# Altium PCB LP_ECG-X01.PcbDoc (part 3 of 4)
Units mm, origin at the board's own origin, x right, y up, seen from the top; angles counter-clockwise.
Board outline 54.86 x 17.53 mm, 2 copper layers (Top Layer, Bottom Layer), stack 0.141 mm thick; 98 components, 68 nets, 322 pads, 93 vias.
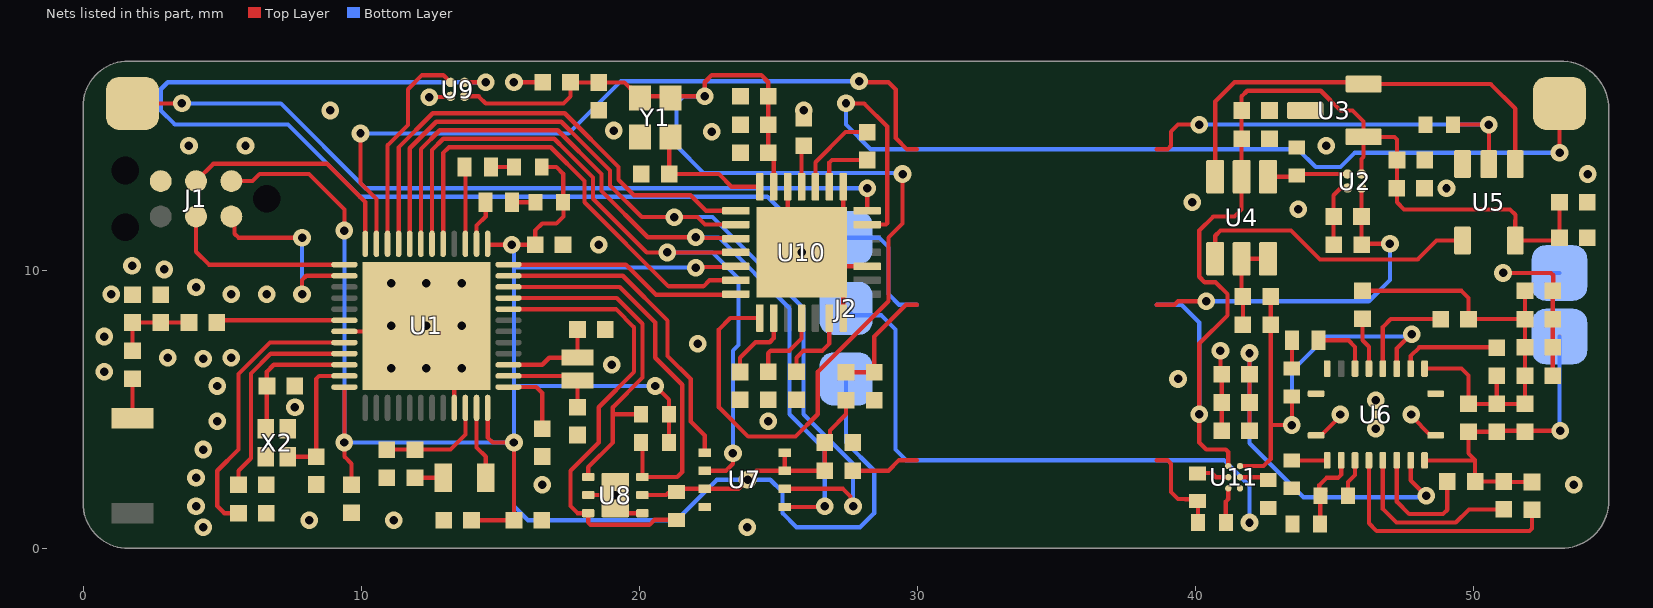
[diagram p2: the nets of this part, all layers, seen from the top]

## Part data (continued)
R10: library part R-0402(1005), "Fixed Resistor, Metal Glaze/thick Film, 0.0625W, 20000ohm, 50V, 1% +/-Tol, 100ppm/Cel, Surface Mount, 0402", Case Code (Imperial)=0402, Case Code (Metric)=1005, Manufacturer=Yageo, Manufacturer Part Number=AC0402FR-0720KL, Max Operating Temperature=155°C, Max Power Dissipation=63mW, Min Operating Temperature=-55°C, Power Rating=62.5mW, Supplier Part Number 1=YAG3454CT-ND, Temperature Coefficient=100ppm/°C, Tolerance=1%, Voltage Rating=50V, Case/Package=0402, Category="Chip SMD Resistors", ComponentLink1Description=https://datasheet.ciiva.com:443/pdfs/VipMasterIC/IC/YAGO/YAGO-S-A0003597364/YAGO-S-A0003597364-1.pdf?src-supplier=IHS+Markit, ComponentLink1URL=https://datasheet.ciiva.com:443/pdfs/VipMasterIC/IC/YAGO/YAGO-S-A0003597364/YAGO-S-A0003597364-1.pdf?src-supplier=IHS+Markit, ComponentLink2Description=http://www.mouser.com/ds/2/447/yageodocoutput-1111992.pdf?src-supplier=Mouser, ComponentLink2URL=http://www.mouser.com/ds/2/447/yageodocoutput-1111992.pdf?src-supplier=Mouser, ComponentLink3Description=http://www.yageo.com/NewPortal/yageodocoutput?fileName=/pdf/R-Chip/PYu-AC_51_RoHS_L_6.pdf&src-supplier=Digi-Key, ComponentLink3URL=http://www.yageo.com/NewPortal/yageodocoutput?fileName=/pdf/R-Chip/PYu-AC_51_RoHS_L_6.pdf&src-supplier=Digi-Key, Composition="Thick Film", Features="Moisture Resistant,Automotive AEC-Q200", Height=0.015inch, Length=0.039inch, Number of Terminations=2, Packaging="Tape and Reel", Pricing 1="1=0.10000, 10=0.02100, 100=0.00870, 1000=0.00390, 2500=0.00338, 5000=0.00279 (USD)", Resistance=20kR, RoHS=Yes, Supplier 1=Digi-Key, Termination=SMD/SMT, Width=0.02inch
R13: library part R-0402(1005), "Fixed Resistor, Metal Glaze/thick Film, 0.0625W, 464ohm, 50V, 1% +/-Tol, 100ppm/Cel, Surface Mount, 0402", Case Code (Imperial)=0402, Case Code (Metric)=1005, Manufacturer=Yageo, Manufacturer Part Number=RC0402FR-07464RL, Max Operating Temperature=155°C, Max Power Dissipation=63mW, Min Operating Temperature=-55°C, Package Quantity=1, Power Rating=62.5mW, Supplier Part Number 1=311-464LRCT-ND, Temperature Coefficient=100ppm/°C, Tolerance=1%, Voltage Rating=50V, Case/Package=0402, Category="Chip SMD Resistors", ComponentLink1Description=https://datasheet.ciiva.com:443/pdfs/VipMasterIC/IC/YAGO/YAGO-S-A0008145938/YAGO-S-A0008145938-1.pdf?src-supplier=IHS+Markit, ComponentLink1URL=https://datasheet.ciiva.com:443/pdfs/VipMasterIC/IC/YAGO/YAGO-S-A0008145938/YAGO-S-A0008145938-1.pdf?src-supplier=IHS+Markit, ComponentLink2Description=https://datasheet.ciiva.com/2519/pyu-r-int-thick-7-2519093.pdf?src-supplier=Digi-Key, ComponentLink2URL=https://datasheet.ciiva.com/2519/pyu-r-int-thick-7-2519093.pdf?src-supplier=Digi-Key, ComponentLink3Description=https://datasheet.ciiva.com/2519/pyu-r-int-thick-7-2519094.pdf?src-supplier=Digi-Key, ComponentLink3URL=https://datasheet.ciiva.com/2519/pyu-r-int-thick-7-2519094.pdf?src-supplier=Digi-Key, ComponentLink4Description=https://datasheet.ciiva.com/2519/pyu-r-int-thick-7-2519095.pdf?src-supplier=Digi-Key, ComponentLink4URL=https://datasheet.ciiva.com/2519/pyu-r-int-thick-7-2519095.pdf?src-supplier=Digi-Key, ComponentLink5Description=https://datasheet.ciiva.com/17052/pyu-rc0402-51-rohs-l-6-r-17052231.pdf?src-supplier=Future+Electronics, ComponentLink5URL=https://datasheet.ciiva.com/17052/pyu-rc0402-51-rohs-l-6-r-17052231.pdf?src-supplier=Future+Electronics, ComponentLink6Description=https://datasheet.ciiva.com/8885/pyu-rc0402-51-rohs-l-6-8885608.pdf?src-supplier=Avnet, ComponentLink6URL=https://datasheet.ciiva.com/8885/pyu-rc0402-51-rohs-l-6-8885608.pdf?src-supplier=Avnet, ComponentLink7Description=https://datasheet.ciiva.com/12577/pyu-rc0402-51-rohs-l-6-r-12577387.pdf?src-supplier=Mouser, ComponentLink7URL=https://datasheet.ciiva.com/12577/pyu-rc0402-51-rohs-l-6-r-12577387.pdf?src-supplier=Mouser, Composition="Thick Film", Contact Plating=Tin,Matte, Depth=0.5mm, Features="Moisture Resistant", Height=0.016inch, Lead Free="Lead Free", Length=1mm, Military Standard=Not, Number of Terminations=2, Packaging="Tape and Reel", Pricing 1="1=0.10000, 10=0.01600, 100=0.00640, 1000=0.00289, 2500=0.00251, 5000=0.00207 (USD)", Resistance=464R, RoHS=Yes, Stock 1=10914, Supplier 1=Digi-Key, Termination=SMD/SMT, Voltage Rating (DC)=50V, Weight=2.3E-05oz, Width=0.02inch
R16: library part R-0402(1005), "Fixed Resistor, Metal Glaze/thick Film, 0.0625W, 3300ohm, 50V, 1% +/-Tol, 100ppm/Cel, Surface Mount, 0402", Case Code (Imperial)=0402, Case Code (Metric)=1005, Manufacturer=Yageo, Manufacturer Part Number=AC0402FR-073K3L, Max Operating Temperature=155°C, Max Power Dissipation=63mW, Min Operating Temperature=-55°C, Power Rating=62.5mW, Supplier Part Number 1=YAG3483CT-ND, Temperature Coefficient=100ppm/°C, Tolerance=1%, Voltage Rating=50V, Case/Package=0402, Category="Chip SMD Resistors", ComponentLink1Description=https://datasheet.ciiva.com:443/pdfs/VipMasterIC/IC/YAGO/YAGO-S-A0003597364/YAGO-S-A0003597364-1.pdf?src-supplier=IHS+Markit, ComponentLink1URL=https://datasheet.ciiva.com:443/pdfs/VipMasterIC/IC/YAGO/YAGO-S-A0003597364/YAGO-S-A0003597364-1.pdf?src-supplier=IHS+Markit, ComponentLink2Description=http://www.mouser.com/ds/2/447/yageodocoutput-1111992.pdf?src-supplier=Mouser, ComponentLink2URL=http://www.mouser.com/ds/2/447/yageodocoutput-1111992.pdf?src-supplier=Mouser, ComponentLink3Description=http://www.yageo.com/NewPortal/yageodocoutput?fileName=/pdf/R-Chip/PYu-AC_51_RoHS_L_6.pdf&src-supplier=Digi-Key, ComponentLink3URL=http://www.yageo.com/NewPortal/yageodocoutput?fileName=/pdf/R-Chip/PYu-AC_51_RoHS_L_6.pdf&src-supplier=Digi-Key, ComponentLink4Description=http://www.yageo.com/documents/recent/PYu-AC_51_RoHS_L_2_revised.pdf?src-supplier=Future+Electronics, ComponentLink4URL=http://www.yageo.com/documents/recent/PYu-AC_51_RoHS_L_2_revised.pdf?src-supplier=Future+Electronics, Composition="Thick Film", Features="Moisture Resistant,Automotive AEC-Q200", Height=0.015inch, Lead Free="Lead Free", Length=0.039inch, Number of Terminations=2, Packaging="Tape and Reel", Pricing 1="1=0.10000, 10=0.02100, 100=0.00870, 1000=0.00390, 2500=0.00338, 5000=0.00279 (USD)", Resistance=3.3kR, RoHS=Yes, Supplier 1=Digi-Key, Termination=SMD/SMT, Width=0.02inch
U1: library part NRSC-NRF52832-QF-48, "Multiprotocol Bluetooth Smart, ANT/ANT+ and Proprietary System-on-Chip, 2.4 GHz, 256 KB FLASH, 1.7 to 3.6 V, -40 to 85 degC, 48-Pin QFN, RoHS, Tape and Reel", Current - Receiving=5.4mA, Current - Transmitting=7.5mA, Frequency=2.4GHz, Manufacturer="Nordic Semiconductor", Supplier Part Number 1=1490-1067-1-ND, Category="RF Receivers, Transceivers", ComponentLink1Description=https://datasheet.ciiva.com:443/pdfs/VipMasterIC/IC/NRSA/NRSA-S-A0002414264/NRSA-S-A0002414264-1.pdf?src-supplier=IHS+Markit, ComponentLink1URL=https://datasheet.ciiva.com:443/pdfs/VipMasterIC/IC/NRSA/NRSA-S-A0002414264/NRSA-S-A0002414264-1.pdf?src-supplier=IHS+Markit, ComponentLink5Description=http://infocenter.nordicsemi.com/pdf/nRF52832_PB_v1.7.pdf?src-supplier=Digi-Key, ComponentLink5URL=http://infocenter.nordicsemi.com/pdf/nRF52832_PB_v1.7.pdf?src-supplier=Digi-Key, ComponentLink6Description=http://infocenter.nordicsemi.com/pdf/nRF52832_PS_v1.4.pdf?src-supplier=Digi-Key, ComponentLink6URL=http://infocenter.nordicsemi.com/pdf/nRF52832_PS_v1.4.pdf?src-supplier=Digi-Key, Data Rate=2Mbps, Interface=SPI,UART, Manufacturer Part Number=NRF52832-QFAA-R7, Memory Size=64KB, Number of GPIO=32, Packaging="Tape and Reel", Pricing 1="1=5.46000, 10=4.87500, 25=4.38760, 100=3.99750, 250=3.60752, 500=3.23700 (USD)", RoHS=No, Sensitivity=-96dBm, Stock 1=7487, Supplier 1=Digi-Key
U2: library part ADP160-3_3V, "Fixed Positive LDO Regulator, 3.3V, 0.195V Dropout, CMOS, PBGA4", Dropout Voltage=105mV, Manufacturer="Analog Devices", Manufacturer Part Number=ADP160ACBZ-3.3-R7, Max Input Voltage=5.5V, Max Operating Temperature=125°C, Max Output Current=150mA, Max Output Voltage=4.2V, Max Supply Current=42uA, Min Current Limit=220mA, Min Input Voltage=2.2V, Min Operating Temperature=-40°C, Min Output Voltage=1.2V, Nominal Output Voltage=3.3V, Output Voltage Accuracy=2%, Package Quantity=3000, Power Supply Rejection Ratio (PSRR)=60dB, Supplier Part Number 1=ADP160ACBZ-3.3-R7CT-ND, Accuracy=2%, Category="Voltage Regulators - Linear", ComponentLink1Description=https://datasheet.ciiva.com:443/pdfs/VipMasterIC/IC/ANDI/ANDI-S-A0005865400/ANDI-S-A0005865400-1.pdf?src-supplier=IHS+Markit, ComponentLink1URL=https://datasheet.ciiva.com:443/pdfs/VipMasterIC/IC/ANDI/ANDI-S-A0005865400/ANDI-S-A0005865400-1.pdf?src-supplier=IHS+Markit, ComponentLink2Description=https://datasheet.ciiva.com/15271/adp160-161-162-163-15271721.pdf?src-supplier=Arrow+Europe, ComponentLink2URL=https://datasheet.ciiva.com/15271/adp160-161-162-163-15271721.pdf?src-supplier=Arrow+Europe, ComponentLink3Description=https://datasheet.ciiva.com/8242/adp160-161-162-163-8242024.pdf?src-supplier=Avnet, ComponentLink3URL=https://datasheet.ciiva.com/8242/adp160-161-162-163-8242024.pdf?src-supplier=Avnet, ComponentLink4Description=https://datasheet.ciiva.com/18552/adp160-161-162-163-18552347.pdf?src-supplier=Digi-Key, ComponentLink4URL=https://datasheet.ciiva.com/18552/adp160-161-162-163-18552347.pdf?src-supplier=Digi-Key, ComponentLink5Description=https://datasheet.ciiva.com/18552/adp160-161-162-163-18552348.pdf?src-supplier=Digi-Key, ComponentLink5URL=https://datasheet.ciiva.com/18552/adp160-161-162-163-18552348.pdf?src-supplier=Digi-Key, ComponentLink6Description=https://datasheet.ciiva.com/18552/adp160-161-162-163-18552349.pdf?src-supplier=Digi-Key, ComponentLink6URL=https://datasheet.ciiva.com/18552/adp160-161-162-163-18552349.pdf?src-supplier=Digi-Key, Lead Free="Contains Lead", Mount="Surface Mount", Nominal Supply Current=42uA, Number of Outputs=1, Number of Pins=4, Number of Regulators=1, Operating Supply Current=42uA, Output Current=150mA, Output Type=Fixed, Output Voltage=3.3V, Packaging="Tape and Reel", Polarity=Positive, Pricing 1="1=1.12000, 10=1.00300, 25=0.95200, 100=0.73100, 250=0.64600, 500=0.61200, 1000=0.49300 (USD)", Radiation Hardening=No, REACH SVHC="No SVHC", RoHS=Yes, Supplier 1=Digi-Key
U3: library part CMP-04937-000003-1, "LP HALL 32FBDBZR", Case/Package=TO-236-3, Manufacturer="Texas Instruments", Max Operating Temperature=85°C, Max Output Current=5mA, Max Supply Current=2.6mA, Min Operating Temperature=-40°C, Supplier Part Number 1=296-47323-1-ND, Category="Integrated Circuits (ICs)", ComponentLink1Description=https://www.ti.com:443/lit/ds/symlink/drv5032.pdf?src-supplier=IHS+Markit, ComponentLink1URL=https://www.ti.com:443/lit/ds/symlink/drv5032.pdf?src-supplier=IHS+Markit, ComponentLink2Description=Datasheet, ComponentLink2URL=http://www.ti.com/lit/ds/symlink/drv5032.pdf, ComponentLink3Description=http://www.ti.com/lit/ds/symlink/drv5032.pdf?src-supplier=Digi-Key, ComponentLink3URL=http://www.ti.com/lit/ds/symlink/drv5032.pdf?src-supplier=Digi-Key, ComponentLink4Description=http://www.ti.com/general/docs/suppproductinfo.tsp?distId=10&amp;gotoUrl=http%3A%2F%2Fwww.ti.com%2Flit%2Fgpn%2Fdrv5032&src-supplier=Digi-Key, ComponentLink4URL=http://www.ti.com/general/docs/suppproductinfo.tsp?distId=10&amp;gotoUrl=http%3A%2F%2Fwww.ti.com%2Flit%2Fgpn%2Fdrv5032&src-supplier=Digi-Key, Manufacturer Part Number=DRV5032FBDBZR, Packaging="Cut Tape", Pricing 1="1=0.80000, 5=0.76600, 10=0.66600, 25=0.58520, 50=0.48600, 100=0.41400, 500=0.36000, 1000=0.31500 (USD)", RoHS=No, Sensing Method="Hall Effect", Stock 1=6326, Supplier 1=Digi-Key
U4: library part CMP-0859-00228-3, "CONFIGURABLE MULTIPLE-FUNCTION GATE, DBV0006A, LARGE T&R", Case/Package=SOT-23, High Level Output Current=-32mA, Low Level Output Current=32mA, Manufacturer="Texas Instruments", Max Operating Temperature=125°C, Max Supply Voltage=5.5V, Min Operating Temperature=-40°C, Min Supply Voltage=1.65V, Package Quantity=3000, Quiescent Current=10uA, Supplier Part Number 1=296-15574-1-ND, Category="Logic Gates", ComponentLink1Description=https://www.ti.com:443/lit/ds/symlink/sn74lvc1g57.pdf?src-supplier=IHS+Markit, ComponentLink1URL=https://www.ti.com:443/lit/ds/symlink/sn74lvc1g57.pdf?src-supplier=IHS+Markit, ComponentLink2Description=https://datasheet.ciiva.com/15090/getdatasheetpartid-173082-15090973.pdf?src-supplier=Verical, ComponentLink2URL=https://datasheet.ciiva.com/15090/getdatasheetpartid-173082-15090973.pdf?src-supplier=Verical, ComponentLink3Description=https://datasheet.ciiva.com/1880/sn74lvc1g57-1880083.pdf?src-supplier=Digi-Key, ComponentLink3URL=https://datasheet.ciiva.com/1880/sn74lvc1g57-1880083.pdf?src-supplier=Digi-Key, ComponentLink4Description=https://datasheet.ciiva.com/1880/sn74lvc1g57-1880084.pdf?src-supplier=Digi-Key, ComponentLink4URL=https://datasheet.ciiva.com/1880/sn74lvc1g57-1880084.pdf?src-supplier=Digi-Key, ComponentLink5Description=https://datasheet.ciiva.com/46395/1882763-46395382.pdf?src-supplier=Element14, ComponentLink5URL=https://datasheet.ciiva.com/46395/1882763-46395382.pdf?src-supplier=Element14, ComponentLink6Description=https://datasheet.ciiva.com/46439/1834192-46439175.pdf?src-supplier=Element14, ComponentLink6URL=https://datasheet.ciiva.com/46439/1834192-46439175.pdf?src-supplier=Element14, ComponentLink7Description=https://datasheet.ciiva.com/7783/1771418-7783483.pdf?src-supplier=Element14, ComponentLink7URL=https://datasheet.ciiva.com/7783/1771418-7783483.pdf?src-supplier=Element14, ComponentLink8Description=https://datasheet.ciiva.com/7783/1771418-7783484.pdf?src-supplier=Element14, ComponentLink8URL=https://datasheet.ciiva.com/7783/1771418-7783484.pdf?src-supplier=Element14, ComponentLink9Description=https://datasheet.ciiva.com/1880/sn74lvc1g57-1880082.pdf?src-supplier=Digi-Key, ComponentLink9URL=https://datasheet.ciiva.com/1880/sn74lvc1g57-1880082.pdf?src-supplier=Digi-Key, ComponentLink10Description=https://datasheet.ciiva.com/48702/001075107-da-01-en-ic-mult-fun-sn74lvc1g57dbvr-sot-23-6-tid-48702374.pdf?src-supplier=Conrad, ComponentLink10URL=https://datasheet.ciiva.com/48702/001075107-da-01-en-ic-mult-fun-sn74lvc1g57dbvr-sot-23-6-tid-48702374.pdf?src-supplier=Conrad, Contact Plating=Gold, Height=1.3mm, Lead Free="Lead Free", Length=3.05mm, Logic Function="NAND GATE,AND GATE,NOR GATE,OR GATE,Inverter,Multi Function", Manufacturer Part Number=SN74LVC1G57DBVR, Max Output Current=32mA, Mount="Surface Mount", Number of Bits=1, Number of Circuits=1, Number of Elements=1, Number of Gates=1, Number of Input Lines=2, Number of Inputs=3, Number of Output Lines=1, Number of Outputs=1, Number of Pins=6, Output Current=32mA, Packaging="Tape and Reel", Pricing 1="1=0.37000, 10=0.28100, 25=0.25320, 100=0.17480, 250=0.14720, 500=0.11960, 1000=0.09200 (USD)", Propagation Delay=6.3ns, Radiation Hardening=No, REACH SVHC="No SVHC", RoHS=Yes, Schmitt Trigger Input=Yes, Stock 1=11185, Supplier 1=Digi-Key, Termination=SMD/SMT, Turn-On Delay Time=6.1ns, Weight=0.000229oz, Width=1.75mm
U5: library part CMP-0859-00176-3, "Single Positive-Edge-Triggered D-Type Flip-Flop, DBV0005A, LARGE T&R", Case/Package=SOT-23, Frequency=160MHz, High Level Output Current=-32mA, Low Level Output Current=32mA, Manufacturer="Texas Instruments", Max Operating Temperature=125°C, Max Supply Voltage=5.5V, Min Operating Temperature=-40°C, Min Supply Voltage=1.65V, Package Quantity=3000, Supplier Part Number 1=296-9851-1-ND, Category="Latches and Flip Flops", Clock Edge Trigger Type="Positive Edge", ComponentLink1Description=https://www.ti.com:443/lit/ds/symlink/sn74lvc1g80.pdf?src-supplier=IHS+Markit, ComponentLink1URL=https://www.ti.com:443/lit/ds/symlink/sn74lvc1g80.pdf?src-supplier=IHS+Markit, ComponentLink2Description=https://datasheet.ciiva.com/15091/getdatasheetpartid-71921-15091286.pdf?src-supplier=Verical, ComponentLink2URL=https://datasheet.ciiva.com/15091/getdatasheetpartid-71921-15091286.pdf?src-supplier=Verical, ComponentLink3Description=https://datasheet.ciiva.com/1854/sn74lvc1g80-1854761.pdf?src-supplier=Digi-Key, ComponentLink3URL=https://datasheet.ciiva.com/1854/sn74lvc1g80-1854761.pdf?src-supplier=Digi-Key, ComponentLink4Description=https://datasheet.ciiva.com/46395/1882705-46395835.pdf?src-supplier=Element14, ComponentLink4URL=https://datasheet.ciiva.com/46395/1882705-46395835.pdf?src-supplier=Element14, ComponentLink5Description=https://datasheet.ciiva.com/1854/sn74lvc1g80-1854762.pdf?src-supplier=Digi-Key, ComponentLink5URL=https://datasheet.ciiva.com/1854/sn74lvc1g80-1854762.pdf?src-supplier=Digi-Key, ComponentLink6Description=https://datasheet.ciiva.com/8055/1831218-8055610.pdf?src-supplier=Element14, ComponentLink6URL=https://datasheet.ciiva.com/8055/1831218-8055610.pdf?src-supplier=Element14, ComponentLink7Description=https://datasheet.ciiva.com/1854/sn74lvc1g80-1854763.pdf?src-supplier=Digi-Key, ComponentLink7URL=https://datasheet.ciiva.com/1854/sn74lvc1g80-1854763.pdf?src-supplier=Digi-Key, Lead Free="Lead Free", Logic Function=D-Type,Flip-Flop, Manufacturer Part Number=SN74LVC1G80DBVR, Max Frequency=160MHz, Mount="Surface Mount", Number of Bits=1, Number of Bits per Element=1, Number of Circuits=1, Number of Elements=1, Number of Gates=1, Number of Input Lines=1, Number of Output Lines=1, Number of Pins=5, Output Current=32mA, Packaging="Tape and Reel", Polarity=Inverting, Pricing 1="1=0.32000, 10=0.24000, 25=0.21000, 100=0.13590, 250=0.11252, 500=0.09000, 1000=0.06900 (USD)", Propagation Delay=9.9ns, Radiation Hardening=No, REACH SVHC="No SVHC", RoHS=Yes, Stock 1=12348, Supplier 1=Digi-Key, Turn-On Delay Time=1.1ns, Weight=0.000557oz
U6: library part TI-BQ51013B-RHL20, "WPC 1.1 Compatible Fully Integrated Wireless Power Receiver IC, 4 V Min Input, 20-pin VQFN (RHL), Green (RoHS & no Sb/Br)", Case/Package=VQFN, Manufacturer="Texas Instruments", Max Operating Temperature=125°C, Min Operating Temperature=0°C, Operating Supply Current=8mA, Output Current=1.5A, Output Voltage=5V, Package Quantity=3000, Supplier Part Number 1=296-38885-1-ND, Category="Power Management ICs", ComponentLink1Description=https://www.ti.com:443/lit/ds/symlink/bq51013b.pdf?src-supplier=IHS+Markit, ComponentLink1URL=https://www.ti.com:443/lit/ds/symlink/bq51013b.pdf?src-supplier=IHS+Markit, ComponentLink2Description=https://datasheet.ciiva.com/6601/bq51013b-6601292.pdf?src-supplier=Digi-Key, ComponentLink2URL=https://datasheet.ciiva.com/6601/bq51013b-6601292.pdf?src-supplier=Digi-Key, Contact Plating=Gold, Lead Free="Lead Free", Logic Function=Receiver, Manufacturer Part Number=BQ51013BRHLR, Mount="Surface Mount", Number of Pins=20, Packaging="Tape and Reel", Pricing 1="1=3.33000, 10=2.97000, 25=2.67320, 100=2.43540, 250=2.19780, 500=1.97208, 1000=1.66320 (USD)", RoHS=Yes, Stock 1=8882, Supplier 1=Digi-Key
U7: library part CY15B108QI, "Memory Circuit, 8 MB FRAM", Manufacturer=Cypress, Manufacturer Part Number=CY15B108QI-20LPXI, Supplier Part Number 1=428-4721-ND, Category=Memory, ComponentLink1Description=https://datasheet.ciiva.com:443/pdfs/VipMasterIC/IC/CYPR/CYPR-S-A0008987076/CYPR-S-A0008987076-1.pdf?src-supplier=IHS+Markit, ComponentLink1URL=https://datasheet.ciiva.com:443/pdfs/VipMasterIC/IC/CYPR/CYPR-S-A0008987076/CYPR-S-A0008987076-1.pdf?src-supplier=IHS+Markit, Pricing 1="1=32.50000, 10=30.55500, 25=29.50560, 50=28.56820, 100=25.13780, 250=24.46300, 500=23.71318, 1000=23.43200 (USD)", RoHS=No, Stock 1=1421, Supplier 1=Digi-Key
U8: library part bceab6869a9cb85cf5675529ee35ce4, "TEMPERATURE SENSOR", Ambient Temperature Range High=+150°C, Ambient Temperature Range Low=-55°C, Manufacturer="Texas Instruments", Max Operating Temperature=150°C, Max Supply Voltage=5.5V, Min Supply Voltage=1.8V, Operating Supply Current=3.5-16uA, Package=DRV0006A, Supplier Part Number 1=296-51834-1-ND, Temperature="-55°C to +150°C", Automotive=No, Category=IC, ComponentLink1Description=https://www.ti.com:443/lit/ds/symlink/tmp117.pdf?src-supplier=IHS+Markit, ComponentLink1URL=https://www.ti.com:443/lit/ds/symlink/tmp117.pdf?src-supplier=IHS+Markit, ComponentLink2Description=Datasheet, ComponentLink2URL=http://www.ti.com/lit/ds/symlink/tmp117.pdf, ComponentLink3Description=http://www.ti.com/lit/gpn/tmp117?src-supplier=Digi-Key, ComponentLink3URL=http://www.ti.com/lit/gpn/tmp117?src-supplier=Digi-Key, Device Class L1=Sensors, Device Class L2="Temperature and Humidity Sensors", Device Class L3=unset, Digikey Description="TEMPERATURE SENSOR", Height=0.8mm, Interface=I2C,2-Wire,SMBus, Ipc Land Pattern Name=DFN200X200X80-6, Lead Free=Yes, Manufacturer Part Number=TMP117AIDRVR, Max Junction Temp=+150°C, Min Operating Temperature=-55°C, Mount="Surface Mount", Octopart=https://octopart.com/tmp117aidrvr-texas+instruments-95511044, Output Type=I2C, Packaging="Cut Tape", Pricing 1="1=8.02000, 5=7.07600, 10=6.25000, 25=5.07040, 50=4.48100, 100=4.36300, 500=3.65552, 1000=3.41968 (USD)", Resolution=16bits, RoHS=TRUE, Standoff Height=0mm, Stock 1=3558, Supplier 1=Digi-Key, Temperature Range High=+150°C, Temperature Range Low=-55°C
U9: library part ADP160-1_8V, "Fixed Positive LDO Regulator, 1.8V, 0.195V Dropout, CMOS, PBGA4", Manufacturer="Analog Devices", Manufacturer Part Number=ADP160ACBZ-1.8-R7, Max Input Voltage=5.5V, Max Operating Temperature=125°C, Max Output Current=150mA, Max Output Voltage=4.2V, Max Supply Current=42uA, Min Current Limit=220mA, Min Input Voltage=2.2V, Min Operating Temperature=-40°C, Min Output Voltage=1.2V, Output Voltage=1.8V, Output Voltage Accuracy=2%, Package Quantity=1, Power Supply Rejection Ratio (PSRR)=60dB, Quiescent Current=0pA, Supplier Part Number 1=ADP160ACBZ-1.8-R7CT-ND, Accuracy=2%, Category="Voltage Regulators - Linear", ComponentLink1Description=https://datasheet.ciiva.com:443/pdfs/VipMasterIC/IC/ANDI/ANDI-S-A0005865400/ANDI-S-A0005865400-1.pdf?src-supplier=IHS+Markit, ComponentLink1URL=https://datasheet.ciiva.com:443/pdfs/VipMasterIC/IC/ANDI/ANDI-S-A0005865400/ANDI-S-A0005865400-1.pdf?src-supplier=IHS+Markit, ComponentLink2Description=https://datasheet.ciiva.com/15270/adp160-161-162-163-15270706.pdf?src-supplier=Arrow+Europe, ComponentLink2URL=https://datasheet.ciiva.com/15270/adp160-161-162-163-15270706.pdf?src-supplier=Arrow+Europe, ComponentLink3Description=https://datasheet.ciiva.com/18552/adp160-161-162-163-18552055.pdf?src-supplier=Digi-Key, ComponentLink3URL=https://datasheet.ciiva.com/18552/adp160-161-162-163-18552055.pdf?src-supplier=Digi-Key, ComponentLink4Description=https://datasheet.ciiva.com/18552/adp160-161-162-163-18552056.pdf?src-supplier=Digi-Key, ComponentLink4URL=https://datasheet.ciiva.com/18552/adp160-161-162-163-18552056.pdf?src-supplier=Digi-Key, ComponentLink5Description=https://datasheet.ciiva.com/18552/adp160-161-162-163-18552054.pdf?src-supplier=Digi-Key, ComponentLink5URL=https://datasheet.ciiva.com/18552/adp160-161-162-163-18552054.pdf?src-supplier=Digi-Key, ComponentLink6Description=https://datasheet.ciiva.com/3224/adp160-161-162-163-3224663.pdf?src-supplier=Avnet, ComponentLink6URL=https://datasheet.ciiva.com/3224/adp160-161-162-163-3224663.pdf?src-supplier=Avnet, Contact Plating=Copper,Tin,Silver, Height=0.37mm, Lead Free="Contains Lead", Length=1mm, Mount="Surface Mount", Nominal Supply Current=42uA, Number of Outputs=1, Number of Pins=4, Number of Regulators=1, Operating Supply Current=42uA, Output Current=150mA, Output Type=Fixed, Packaging="Tape and Reel", Polarity=Positive, Pricing 1="1=1.12000, 10=1.00300, 25=0.95200, 100=0.73100, 250=0.64600, 500=0.61200, 1000=0.49300 (USD)", Radiation Hardening=No, RoHS=Yes, Stock 1=5770, Supplier 1=Digi-Key, Width=1mm
U10: "Analog Circuit, 1 Func, CMOS", Manufacturer=Maxim, Max Operating Temperature=70°C, Max Supply Voltage=2V, Min Operating Temperature=0°C, Min Supply Voltage=1.2V, Supplier Part Number 1=MAX30003CTI+-ND, Category="RF Semiconductors and Devices", ComponentLink1Description=https://datasheet.ciiva.com:443/pdfs/VipMasterIC/IC/MAXM/MAXM-S-A0009086108/MAXM-S-A0009086108-1.pdf?src-supplier=IHS+Markit, ComponentLink1URL=https://datasheet.ciiva.com:443/pdfs/VipMasterIC/IC/MAXM/MAXM-S-A0009086108/MAXM-S-A0009086108-1.pdf?src-supplier=IHS+Markit, ComponentLink2Description=http://www.farnell.com/datasheets/2159846.pdf?src-supplier=Farnell, ComponentLink2URL=http://www.farnell.com/datasheets/2159846.pdf?src-supplier=Farnell, ComponentLink3Description=https://pdfserv.maximintegrated.com/en/an/MAX-ECG-MONITOR-User-Guide.pdf?src-supplier=Digi-Key, ComponentLink3URL=https://pdfserv.maximintegrated.com/en/an/MAX-ECG-MONITOR-User-Guide.pdf?src-supplier=Digi-Key, ComponentLink4Description=http://www.farnell.com/datasheets/2159846.pdf?src-supplier=Element14, ComponentLink4URL=http://www.farnell.com/datasheets/2159846.pdf?src-supplier=Element14, Manufacturer Part Number=MAX30003CTI+, Number of Pins=28, Pricing 1="1=8.21000, 10=7.41200, 25=7.06760, 100=5.86090, 250=5.34380, 500=4.99902, 1000=4.98888 (USD)", REACH SVHC="No SVHC", RoHS=No, Stock 1=286, Supplier 1=Digi-Key
U11: "Power Supply Support Circuit", Battery Pack Voltage=4.2V, Manufacturer="Texas Instruments", Max Charge Current=250mA, Max Operating Temperature=85°C, Max Supply Voltage=6.45V, Min Operating Temperature=-40°C, Min Supply Voltage=3.5V, Operating Supply Current=75nA, Output Voltage=4.35V, Package Quantity=250, Supplier Part Number 1=296-38373-1-ND, Category="Batteries and Accessories", ComponentLink1Description=https://www.ti.com:443/lit/ds/symlink/bq25100.pdf?src-supplier=IHS+Markit, ComponentLink1URL=https://www.ti.com:443/lit/ds/symlink/bq25100.pdf?src-supplier=IHS+Markit, ComponentLink2Description=https://datasheet.ciiva.com/46404/1854517-46404758.pdf?src-supplier=Element14, ComponentLink2URL=https://datasheet.ciiva.com/46404/1854517-46404758.pdf?src-supplier=Element14, Contact Plating=Copper,Tin,Silver, Fault Protection="Over Voltage,Over Temperature,Short Circuit", Lead Free="Lead Free", Manufacturer Part Number=BQ25100YFPT, Mount="Surface Mount", Number of Cells=1, Number of Pins=6, Output Current=250mA, Packaging="Tape and Reel", Pricing 1="1=2.24000, 10=2.01100, 25=1.89760, 100=1.51800 (USD)", REACH SVHC="No SVHC", RoHS=Yes, Stock 1=3049, Supplier 1=Digi-Key, Weight=6E-05oz
X1: library part CRYSTAL_32K768, "Parallel - Fundamental Quartz Crystal, 0.032768MHz Nom", Case/Package=SMD/SMT, ESR (Equivalent Series Resistance)=90kR, Frequency=32.768kHz, Frequency Tolerance=20ppm, Load Capacitance=9pF, Manufacturer="ECS International", Manufacturer Part Number=ECS-.327-9-1210-TR, Max Operating Temperature=85°C, Min Operating Temperature=-40°C, Supplier Part Number 1=XC2283CT-ND, Category="Crystals and Oscillators", ComponentLink1Description=https://datasheet.ciiva.com:443/pdfs/VipMasterIC/IC/ECSI/ECSI-S-A0009254912/ECSI-S-A0009254912-1.pdf?src-supplier=IHS+Markit, ComponentLink1URL=https://datasheet.ciiva.com:443/pdfs/VipMasterIC/IC/ECSI/ECSI-S-A0009254912/ECSI-S-A0009254912-1.pdf?src-supplier=IHS+Markit, ComponentLink2Description=https://www.ecsxtal.com/store/pdf/ECX-1210.pdf?src-supplier=Digi-Key, ComponentLink2URL=https://www.ecsxtal.com/store/pdf/ECX-1210.pdf?src-supplier=Digi-Key, Mount="Surface Mount", Packaging="Tape and Reel", Pricing 1="1=1.52000, 10=1.45400, 50=1.42060, 100=1.21770, 500=1.18388, 1000=0.99784, 2500=0.94710 (USD)", RoHS=No, Stock 1=5205, Supplier 1=Digi-Key
X2: library part CRYSTAL_32MHz, "Parallel - Fundamental Quartz Crystal, 32MHz Nom", Case/Package=SMD/SMT, ESR (Equivalent Series Resistance)=80R, Frequency Stability=10ppm, Load Capacitance=8pF, Manufacturer=Diodes, Manufacturer Part Number=US3200005Z, Max Operating Temperature=70°C, Min Operating Temperature=-20°C, Supplier Part Number 1=US3200005ZCT-ND, Category=Crystals, ComponentLink1Description=https://datasheet.ciiva.com:443/pdfs/VipMasterIC/IC/DIOD/DIOD-S-A0002236499/DIOD-S-A0002236499-1.pdf?src-supplier=IHS+Markit, ComponentLink1URL=https://datasheet.ciiva.com:443/pdfs/VipMasterIC/IC/DIOD/DIOD-S-A0002236499/DIOD-S-A0002236499-1.pdf?src-supplier=IHS+Markit, ComponentLink2Description=https://media.digikey.com/pdf/Data%20Sheets/Pericom%20PDFs/US3200005Z_Ver.A.pdf?src-supplier=Digi-Key, ComponentLink2URL=https://media.digikey.com/pdf/Data%20Sheets/Pericom%20PDFs/US3200005Z_Ver.A.pdf?src-supplier=Digi-Key, Frequency=32MHz, Frequency Tolerance=10ppm, Height=0.014inch, Length=0.063inch, Mount="Surface Mount", Packaging="Tape and Reel", Pricing 1="1=1.45000, 10=1.38400, 50=1.35200, 100=1.15880, 500=1.12666, 1000=0.94961 (USD)", RoHS=Yes, Supplier 1=Digi-Key, Width=0.047inch
Y1: library part OSCILLATOR_32K768, "Oscillator Xo 0.032768MHZ ±25PPM 15PF Lvcmos/lvttl 55% 1.8V 4-PIN Csmd T/r", Case/Package=SMD/SMT, Frequency=32.768kHz, Frequency Stability=25ppm, Load Capacitance=15pF, Manufacturer=Diodes, Manufacturer Part Number=KX2013B0032.768000, Max Operating Temperature=70°C, Max Supply Current=30uA, Max Supply Voltage=1.89V, Min Operating Temperature=-20°C, Min Supply Voltage=1.71V, Operating Supply Voltage=1.8V, Package Quantity=100, Supplier Part Number 1=31-KX2013B0032.768000CT-ND, Category=Oscillators, ComponentLink1Description=http://www.mouser.com/ds/2/322/KX201-Rev-A-461590.pdf?src-supplier=Mouser, ComponentLink1URL=http://www.mouser.com/ds/2/322/KX201-Rev-A-461590.pdf?src-supplier=Mouser, ComponentLink2Description=https://www.pericom.com/assets/Datasheets/KX201.pdf?src-supplier=Digi-Key, ComponentLink2URL=https://www.pericom.com/assets/Datasheets/KX201.pdf?src-supplier=Digi-Key, ComponentLink3Description=https://www.diodes.com/assets/Datasheets/KX201.pdf?src-supplier=Digi-Key, ComponentLink3URL=https://www.diodes.com/assets/Datasheets/KX201.pdf?src-supplier=Digi-Key, Height=0.033inch, Length=0.079inch, Max Duty Cycle=55%, Mount="Surface Mount", Packaging="Cut Strip", Pricing 1="1=3.22000, 10=3.14700, 50=2.99700, 100=2.62240, 500=2.54746, 1000=2.17283 (USD)", RoHS=Yes, Stock 1=1562, Supplier 1=Digi-Key, Termination=SMD/SMT, Width=0.063inch

## Via types
v1: diameter 0.635, hole 0.305, Top Layer to Bottom Layer, 93 vias

## Nets (pads, with @x,y where several pads share a name; then routed paths per layer and width w, separated by ;. In a path a pad name is that pad's centre, name@x,y a point inside that pad or via, vN(x,y) a via of type N, cw(c..) or ccw(c..) an arc to the next point about the centre after c; other vN are vias at no path point)
\H\E\_\E\N\: U3.2 U4.6 U5.1 | length 16.2
  Top Layer w0.152: U4.6@40.706,13.364 40.706,16.068 41.402,16.764 45.976,16.764 U3.2@46.042,16.698 48.611,16.698 48.614,16.701 50.609,16.701 51.496,15.814 U5.1@51.496,13.821
\Q\_\O\U\T\: U4.1 U5.4 | length 10.5
  Top Layer w0.152: U4.1@40.706,10.414 40.706,11.242 40.894,11.43 43.434,11.43 44.471,10.393 47.985,10.393 48.663,11.071 U5.4@49.596,11.071
BLE_ANT: C11.1 U1.30 | length 4.6
  Top Layer w0.152: C11.1@4.81,8.204 U1.30@9.398,8.204
CHG_N: D3.K U6.7 | length 2.2
  Top Layer w0.152: D3.K@44.413,7.485 45.495,7.485 45.733,7.247 U6.7@45.733,6.467
DEC4: C8.2 L1.1 U1.46 | length 4
  Top Layer w0.152: C8.2@10.922,3.556 13.208,3.556 13.748,4.096 U1.46@13.748,5.054
ENABLE_LDO: R6.1 U2.B1 U4.4 | length 2.9
  Top Layer w0.152: U4.4@42.606,13.364 43.59,13.364 R6.1@43.639,13.413 43.688,13.462 U2.B1@45.466,13.462
FRAM_CS: U1.11 U7.1 | length 11.7
  Top Layer w0.152: U1.11@15.298,9.804 19.406,9.804 21.018,8.192 21.018,6.921 21.849,6.091 21.849,4.567 22.352,4.064 U7.1@22.352,3.444
GND: C1.1 C2.1 C3.2 C4.2 C5.2 C6.2 C7.2 C8.1 C9.2 C10.2 C12.2 C13.2 C14.2 C15.1 C16.2 C17.1 C18.2 C19.1 C20.2 C21.1 C22.2 C23.2 C24.1 C25.2 C26.1 C27.2 C28.1 C29.1 C30.1 C31.1 C32.1 C34.2 C35.2 C37.2 C40.1 C41.1 C42.1 C43.1 C44.1 J1.5 J2.2 L4.1 R6.2 R7.1 R8.2 R9.2 R14.1 R15.1 R16.1 U1.31 U1.45 U1.49 U2.B2 U3.3 U4.2 U4.3 U5.3 U6.1 U6.9 U6.10 U6.11 U6.20 U6.21 U7.4 U8.2 U8.4 U8.7 U9.B2 U10.3 U10.8 U10.12 U10.28 U10.29 U11.C2 X2.2 X2.4 Y1.2 | length 60.1
  Top Layer w0.152: U1.31@9.398,7.804 U1.49@12.148,7.804 ; U1.49@11.348,9.004 11.798,8.554 v1(12.348,8.004) 13.348,7.004 U1.45@13.348,5.054 ; v1(12.446,16.218) 12.465,16.237 13.197,16.237 U9.B2@13.216,16.256 ; v1(15.494,16.764) C28.1@16.526,16.764 ; U8.2@18.161,1.92 v1(19.136,1.92) 19.136,1.694 19.56,1.27 U8.4@20.111,1.27 ; U10.12@25.334,13.004 25.334,11.144 v1(25.834,10.644) ; C35.2@25.646,5.342 C35.2@25.654,5.35 ; C32.1@25.908,15.478 C32.1@25.924,15.494 ; U10.28@27.334,8.284 27.334,9.144 U10.29@26.334,10.144 ; U10.8@27.334,13.004 27.334,12.144 v1(25.834,10.644) ; C23.2@27.67,2.794 28.956,2.794 29.337,3.175 29.972,3.175 ; U10.3@28.194,10.144 U10.29@26.334,10.144 ; 38.608,3.175 38.989,3.175 39.116,3.048 39.116,2.032 39.37,1.778 39.624,1.778 39.634,1.768 40.006,1.768 R15.1@40.073,1.701 40.089,1.685 R14.1@40.089,0.931 ; v1(40.894,7.112) 40.894,6.31 C42.1@40.939,6.265 C43.1@40.939,5.249 C44.1@40.939,4.233 ; C41.1@41.701,8.043 C40.1@41.701,9.059 41.656,9.104 U4.2@41.656,10.414 U4.3@42.606,10.414 ; U6.11@44.333,4.067 44.513,4.067 45.208,4.762 v1(45.208,4.817) ; C14.2@44.958,10.922 44.958,12.7 45.212,12.954 45.458,12.954 U2.B2@45.466,12.962 ; v1(47.758,4.817) 47.758,4.762 48.453,4.067 U6.20@48.633,4.067 ; R7.1@48.244,15.224 R7.1@48.26,15.24 ; v1(25.834,10.644) U10.29@26.334,10.144
  Bottom Layer w0.152: J2.2@27.432,8.636 27.686,8.382 28.702,8.382 29.21,7.874 29.21,3.556 29.591,3.175 41.021,3.175 41.939,2.257 v1(41.939,0.931)
  other v1: 4.318,0.762 23.876,0.762 8.128,1.016 11.176,1.016 4.064,1.524 16.51,2.286 53.594,2.286 4.064,2.54 4.318,3.556 46.483,4.309 4.826,4.572 24.638,4.572 7.62,5.08 46.483,5.325 4.826,5.842 39.37,6.096 0.762,6.35 11.078,6.48 12.348,6.48 13.618,6.48 19.012,6.604 4.318,6.821 3.048,6.858 5.334,6.858 22.098,7.366 0.762,7.62 11.078,8.004 13.618,8.004 1.016,9.144 5.334,9.144 6.604,9.144 4.064,9.398 11.078,9.528 12.348,9.528 13.618,9.528 2.921,10.033 1.762,10.16 18.542,10.922 43.688,12.192 39.878,12.446 49.022,12.954 54.102,13.462 3.81,14.478 5.842,14.478 44.704,14.478 22.606,14.986 19.085,15.027 8.89,15.748 25.908,15.748
LED_BLE: D2.K U1.14 | length 1.6
  Top Layer w0.152: U1.14@14.148,10.954 14.148,11.608 14.478,11.938 D2.K@14.478,12.446
LED_IND: D1.K U1.15 | length 2.8
  Top Layer w0.152: D1.K@13.716,13.716 13.748,13.684 U1.15@13.748,10.954
MAX30003_CS: U1.21 U10.15 | length 17.8
  Top Layer w0.152: U1.21@11.348,10.954 11.348,14.419 12.575,15.646 17.32,15.646 19.253,13.713 19.253,13.259 19.812,12.7 21.844,12.7 22.4,12.144 U10.15@23.474,12.144
MAX30003_F_CLOCK: C22.1 U10.14 Y1.3 | length 4.8
  Top Layer w0.152: Y1.3@21.124,14.794 21.074,14.744 C22.1@21.074,13.462 22.86,13.462 23.318,13.004 U10.14@24.334,13.004
MAX30003_INT1: U1.12 U10.21 | length 8.6
  Top Layer w0.152: U1.12@15.298,10.204 19.514,10.204 20.598,9.12 23.45,9.12 U10.21@23.474,9.144
MAX30003_INT2: U1.17 U10.20 | length 16.5
  Top Layer w0.152: U1.17@12.948,10.954 12.948,14.218 13.157,14.427 16.815,14.427 18.034,13.208 18.034,12.446 21.055,9.425 22.303,9.425 22.522,9.644 U10.20@23.474,9.644
MCU_ENABLE_1.8V: U1.22 U9.B1 | length 7.7
  Top Layer w0.152: U1.22@10.948,10.954 10.948,14.494 11.684,15.23 11.684,16.51 12.192,17.018 12.954,17.018 U9.B1@13.216,16.756
MCU_ENABLE_VCC: R7.2 U1.23 U5.2 | length 42.3
  Top Layer w0.152: v1(9.977,14.921) 9.977,13.137 10.548,12.566 U1.23@10.548,10.954 ; v1(27.902,16.802) 27.94,16.764 28.956,16.764 29.222,16.498 29.222,14.758 29.629,14.351 29.972,14.351 ; 38.608,14.351 38.989,14.351 39.116,14.478 39.116,14.986 39.37,15.24 v1(40.132,15.24) ; R7.2@49.26,15.24 v1(50.546,15.24) U5.2@50.546,13.821
  Bottom Layer w0.152: v1(9.977,14.921) 17.461,14.921 19.342,16.802 v1(27.902,16.802) ; v1(40.132,15.24) v1(50.546,15.24)
NetC1_2: C1.2 U1.3 X1.1 | length 3.6
  Top Layer w0.152: U1.3@15.298,6.604 16.51,6.604 16.764,6.858 X1.1@17.78,6.858 C1.2@17.78,7.874
NetC2_2: C2.2 U1.2 X1.2 | length 3.5
  Top Layer w0.152: U1.2@15.298,6.204 17.614,6.204 X1.2@17.78,6.038 C2.2@17.78,5.08
NetC3_1: C3.1 U1.34 X2.3 | length 5
  Top Layer w0.152: X2.3@6.566,4.302 6.604,4.34 6.604,5.588 6.604,6.35 6.858,6.604 U1.34@9.398,6.604
NetC4_1: C4.1 U1.35 X2.1 | length 4.7
  Top Layer w0.152: X2.1@7.366,3.302 8.128,3.302 8.382,3.556 8.382,6.096 8.49,6.204 U1.35@9.398,6.204
NetC5_1: C5.1 U1.1 | length 2.6
  Top Layer w0.152: U1.1@15.298,5.804 16.294,5.804 16.51,5.588 C5.1@16.51,4.31
NetC6_1: C6.1 U1.32 | length 10.2
  Top Layer w0.152: C6.1@5.588,1.27 5.08,1.27 4.826,1.524 4.826,2.794 5.588,3.556 5.588,6.273 6.719,7.404 U1.32@9.398,7.404
NetC7_1: C7.1 U1.33 | length 7.8
  Top Layer w0.152: C7.1@5.588,2.286 5.588,2.794 6.037,3.243 6.037,6.291 6.75,7.004 U1.33@9.398,7.004
NetC11_2: C11.2 C12.1 L3.1 L4.2 | length 3.1
  Top Layer w0.152: L3.1@1.778,7.104 L4.2@1.778,8.128 C12.1@2.794,8.128 C11.2@3.81,8.128
NetC13_1: C13.1 C14.1 C15.2 L5.1 U2.A2 | length 17.4
  Top Layer w0.152: L5.1@27.432,6.334 C13.1@28.448,6.334 28.448,7.62 29.591,8.763 29.972,8.763 ; 38.608,8.763 39.243,8.763 39.37,8.89 v1(40.386,8.89) ; U2.A2@45.966,12.962 C15.2@45.966,11.938 45.966,10.93 C14.1@45.974,10.922 46.012,10.96 v1(46.99,10.96)
  Bottom Layer w0.152: v1(40.386,8.89) 46.228,8.89 46.99,9.652 v1(46.99,10.96)
NetC32_2: C32.2 U10.11 | length 1.5
  Top Layer w0.152: U10.11@25.834,13.004 25.834,14.404 C32.2@25.908,14.478
NetC34_1: C34.1 U10.23 | length 2.7
  Top Layer w0.152: C34.1@23.622,6.342 23.622,6.858 24.181,7.417 24.689,7.417 24.834,7.562 U10.23@24.834,8.284
NetC35_1: C35.1 U10.27 | length 2.8
  Top Layer w0.152: C35.1@25.654,6.35 25.654,6.858 25.908,7.112 26.581,7.112 26.834,7.365 U10.27@26.834,8.284
NetC37_1: C37.1 U10.25 | length 2.8
  Top Layer w0.152: C37.1@24.638,6.35 24.638,7.023 24.727,7.112 25.4,7.112 25.834,7.546 U10.25@25.834,8.284
NetC39_1: C39.1 U10.9 | length 2.3
  Top Layer w0.152: U10.9@26.834,13.004 26.834,13.88 26.924,13.97 C39.1@28.194,13.97
NetC39_2: C39.2 U10.10 | length 3.2
  Top Layer w0.152: U10.10@26.334,13.004 26.334,13.888 27.416,14.97 C39.2@28.194,14.97
NetC42_2: C42.2 C43.2 C44.2 U6.18 | length 14.7
  Top Layer w0.152: C44.2@41.939,4.233 C43.2@41.939,5.249 C42.2@41.939,6.265 v1(41.939,7.027) ; U6.18@47.733,3.167 47.733,2.453 v1(48.289,1.897)
  Bottom Layer w0.152: v1(41.939,7.027) 41.939,3.781 43.879,1.841 48.233,1.841 v1(48.289,1.897)
NetC45_1: C45.1 C47.1 C49.1 C51.1 L6.2 | length 7.5
  Top Layer w0.152: v1(51.054,9.906) 52.776,9.906 52.861,9.821 52.861,9.279 C49.1@52.845,9.263 C47.1@52.845,8.247 C45.1@52.845,7.231 C51.1@52.845,6.215
  Bottom Layer w0.152: v1(51.054,9.906) L6.2@53.086,9.906
NetC45_2: C45.2 C46.1 C47.2 C48.1 C49.2 C50.1 C51.2 C52.1 C53.1 C54.1 U6.2 | length 16.5
  Top Layer w0.152: C48.1@46.003,9.263 49.559,9.263 49.813,9.009 C46.1@49.813,8.247 C47.2@51.845,8.247 ; U6.2@48.233,6.467 49.561,6.467 49.813,6.215 C54.1@49.813,5.199 C53.1@50.829,5.199 ; C50.1@50.829,6.215 C53.1@50.829,5.199 ; C49.2@51.845,9.263 C47.2@51.845,8.247 ; C53.1@50.829,5.199 C52.1@51.845,5.199 C51.2@51.845,6.215 C45.2@51.845,7.231 C47.2@51.845,8.247
NetC46_2: C46.2 U6.5 | length 3.7
  Top Layer w0.152: U6.5@46.733,6.467 46.733,7.961 47.019,8.247 C46.2@48.813,8.247
NetC48_2: C48.2 U6.6 | length 1.9
  Top Layer w0.152: C48.2@46.003,8.263 46.003,7.485 46.233,7.255 U6.6@46.233,6.467
NetC50_2: C50.2 U6.3 | length 3.7
  Top Layer w0.152: U6.3@47.733,6.467 47.733,6.919 48.045,7.231 50.813,7.231 C50.2@50.829,7.215
NetC52_2: C52.2 C53.2 C54.2 C55.1 C56.1 C57.1 L6.1 U6.19 | length 12.6
  Top Layer w0.152: U6.19@48.233,3.167 50.035,3.167 50.051,3.183 ; C56.1@52.099,2.389 51.099,2.389 C57.1@51.083,2.405 C55.1@50.051,2.405 50.051,3.183 ; v1(53.115,4.233) 50.863,4.233 C53.2@50.829,4.199 C54.2@49.813,4.199 49.813,3.421 50.051,3.183
  Bottom Layer w0.152: v1@53.086,4.064 L6.1@53.086,7.62
NetC55_2: C55.2 U6.17 | length 4.6
  Top Layer w0.152: U6.17@47.233,3.167 47.233,1.683 47.679,1.237 48.899,1.237 49.051,1.389 C55.2@49.051,2.405
NetC56_2: C56.2 U6.15 | length 9
  Top Layer w0.152: U6.15@46.233,3.167 46.233,0.905 46.511,0.627 52.01,0.627 52.099,0.716 C56.2@52.099,1.389
NetC57_2: C57.2 U6.16 | length 6.5
  Top Layer w0.152: U6.16@46.733,3.167 46.733,1.421 47.222,0.932 49.356,0.932 49.829,1.405 C57.2@51.083,1.405
NetD1_A: D1.A R4.2 | length 0.8
  Top Layer w0.152: D1.A@14.666,13.716 R4.2@15.494,13.716
NetD2_A: D2.A R5.2 | length 0.8
  Top Layer w0.152: D2.A@15.428,12.446 R5.2@16.264,12.446
NetD3_A: D3.A R13.1 | length 1
  Top Layer w0.152: R13.1@43.463,6.469 D3.A@43.463,7.485
NetE1_1: E1.1 L3.2 | length 1.5
  Top Layer w0.152: L3.2@1.762,6.088 L3.2@1.778,6.104 E1.1@1.778,4.676
NetJ3_1: J3.1 U10.7 | length 28.5
  Top Layer w0.152: J3.1@1.778,16.002 v1(3.556,16.002) ; U10.7@28.194,12.144 v1(28.194,12.954)
  Bottom Layer w0.152: v1(3.556,16.002) 7.112,16.002 10.16,12.954 v1(28.194,12.954)
NetJ4_1: J4.1 U10.6 | length 35.1
  Top Layer w0.152: v1(27.432,16.002) 28.085,16.002 28.918,15.17 28.918,11.695 28.867,11.644 U10.6@28.194,11.644 ; v1(53.086,14.224) J4.1@53.086,16.002
  Bottom Layer w0.152: v1(27.432,16.002) 27.432,15.24 28.321,14.351 43.688,14.351 44.323,13.716 45.212,13.716 45.72,14.224 v1(53.086,14.224)
NetL1_2: L1.2 L2.1 | length 1
  Top Layer w0.152: L1.2@11.938,2.548 11.946,2.54 L2.1@12.954,2.54
NetL2_2: L2.2 U1.47 | length 2.7
  Top Layer w0.152: U1.47@14.148,5.054 14.148,3.632 14.478,3.302 L2.2@14.478,2.54
NetR8_1: R8.1 U6.12 | length 1.3
  Top Layer w0.152: R8.1@43.463,3.167 U6.12@44.733,3.167
NetR9_1: R9.1 R10.2 U6.13 | length 3.1
  Top Layer w0.152: R9.1@44.479,0.881 R10.2@44.479,1.897 ; R10.2@44.661,2.071 R10.2@44.487,1.897 44.45,1.934 44.45,2.286 44.704,2.54 45.122,2.54 45.241,2.659 45.241,3.159 U6.13@45.233,3.167
NetR10_1: R10.1 U6.14 | length 1.4
  Top Layer w0.152: R10.1@45.479,1.897 45.479,2.389 45.733,2.643 U6.14@45.733,3.167
NetR14_2: R14.2 U11.C1 | length 1.3
  Top Layer w0.152: R14.2@41.089,0.931 41.089,1.693 41.177,1.781 U11.C1@41.177,2.163
NetR15_2: R15.2 U11.B1 | length 1.2
  Top Layer w0.152: R15.2@40.073,2.701 40.081,2.709 40.581,2.709 40.727,2.563 U11.B1@41.177,2.563
NetR16_2: R16.2 U11.B2 | length 1.1
  Top Layer w0.152: U11.B2@41.597,2.563 42.505,2.563 R16.2@42.613,2.455
nRESET: J1.3 U1.24 | length 8.4
  Top Layer w0.152: J1.3@4.064,13.208 4.686,13.83 8.776,13.83 10.148,12.458 U1.24@10.148,10.954
SCL_I2C: R2.2 U1.9 U8.1 | length 12.5
  Top Layer w0.152: U1.9@15.298,9.004 19.19,9.004 20.117,8.077 20.117,6.147 19.05,5.08 19.05,4.826 ; U8.1@18.161,2.57 18.161,2.921 19.05,3.81 19.05,4.826 ; R2.2@20.066,4.826 19.05,4.826
SDA_I2C: R3.2 U1.10 U8.6 | length 14.3
  Top Layer w0.152: U1.10@15.298,9.404 19.298,9.404 20.574,8.128 20.574,6.858 21.545,5.887 21.545,2.749 21.366,2.57 U8.6@20.111,2.57 R3.2@20.111,3.81
SPI_CLK: U1.20 U7.6 U10.16 | length 34.1
  Top Layer w0.152: U1.20@11.748,10.954 11.748,14.388 12.701,15.342 17.194,15.342 17.919,14.617 18.948,13.587 18.948,13.056 20.09,11.914 v1(21.262,11.914) 22.089,11.914 22.359,11.644 U10.16@23.474,11.644 ; U7.6@25.232,2.144 27.32,2.144 27.594,1.87 27.594,1.616 v1(27.686,1.524)
  Bottom Layer w0.152: v1(21.262,11.914) 22.63,11.914 25.908,8.636 25.908,4.826 27.686,3.048 v1(27.686,1.524)
SPI_SDI: U1.19 U7.5 U10.17 | length 30.5
  Top Layer w0.152: U1.19@12.148,10.954 12.148,14.357 12.828,15.037 17.067,15.037 18.644,13.461 18.644,12.852 20.306,11.19 v1(22.024,11.19) 22.047,11.167 23.451,11.167 U10.17@23.474,11.144 ; U7.5@25.232,1.494 26.64,1.494 v1(26.67,1.524)
  Bottom Layer w0.152: v1(22.024,11.19) 22.038,11.176 22.86,11.176 25.4,8.636 25.4,4.826 26.67,3.556 v1(26.67,1.524)
SPI_SDO: U1.18 U7.2 U10.18 | length 27.4
  Top Layer w0.152: U1.18@12.548,10.954 12.548,14.326 12.954,14.732 16.941,14.732 17.361,14.313 18.339,13.334 18.339,12.572 20.267,10.644 v1(21.008,10.644) U10.18@23.474,10.644 ; U7.2@22.352,2.794 23.114,2.794 23.368,3.048 v1(23.368,3.429)
  Bottom Layer w0.152: v1(21.008,10.644) 22.63,10.644 23.571,9.703 23.571,7.315 23.368,7.112 v1(23.368,3.429)
SWD_CLK: J1.4 U1.25 | length 6.8
  Top Layer w0.152: J1.4@4.064,11.938 4.064,10.668 4.528,10.204 U1.25@9.398,10.204
SWD_DIO: J1.2 U1.26 | length 7.3
  Top Layer w0.152: J1.2@5.334,11.938 5.448,11.824 5.448,11.316 5.588,11.176 v1(7.874,11.176) ; v1(7.874,9.144) 7.874,9.652 8.026,9.804 U1.26@9.398,9.804
  Bottom Layer w0.152: v1(7.874,9.144) v1(7.874,11.176)
TMP117_ALERT: R1.2 U1.8 U8.3 | length 16.3
  Top Layer w0.152: U1.8@15.298,8.604 19.159,8.604 19.812,7.951 19.812,6.35 18.542,5.08 18.542,3.81 17.526,2.794 17.526,1.524 17.78,1.27 U8.3@18.161,1.27 18.161,0.94 18.25,0.851 20.361,0.851 20.542,1.032 R1.2@21.082,1.032
V_BATT: C16.1 C17.2 C18.1 C19.2 C20.1 C21.2 J2.1 U2.A1 U3.1 U4.5 U5.5 U9.A1 U11.A1 | length 84.4
  Top Layer w0.152: U9.A1@13.716,16.756 13.72,16.76 14.474,16.76 v1(14.478,16.764) ; U11.A1@41.177,2.963 41.177,3.467 41.088,3.556 40.386,3.556 40.132,3.81 v1(40.132,4.826) 40.132,7.366 41.148,8.382 41.148,9.144 40.719,9.573 40.327,9.573 40.132,9.768 40.132,11.43 40.64,11.938 41.402,11.938 41.656,12.192 U4.5@41.656,13.364 C18.1@41.656,14.732 C19.2@41.656,15.748 41.656,16.256 41.859,16.459 44.501,16.459 45.212,15.748 45.644,15.748 46.042,15.35 U3.1@46.042,14.798 ; U2.A1@45.966,13.462 45.966,14.005 46.042,14.081 U3.1@46.042,14.798 ; C20.1@53.086,12.446 C21.2@53.086,11.176 52.981,11.071 U5.5@51.496,11.071 51.496,11.8 51.499,11.802 51.499,12.001 51.308,12.192 47.498,12.192 47.244,12.446 47.244,12.938 C16.1@47.228,12.954 47.244,12.97 C17.2@47.244,13.97 47.244,14.709 47.155,14.798 U3.1@46.042,14.798
  Bottom Layer w0.152: v1(14.478,16.764) 3.048,16.764 2.794,16.51 2.794,15.748 3.302,15.24 7.366,15.24 9.957,12.649 24.601,12.649 26.074,11.176 J2.1@27.432,11.176 28.613,11.176 28.956,10.833 28.956,9.144 29.337,8.763 29.972,8.763 ; 38.608,8.763 39.497,8.763 40.132,8.128 v1(40.132,4.826)
V_ECG: C27.1 C28.2 C29.2 C30.2 C31.2 U9.A2 U10.13 U10.22 Y1.1 Y1.4 | length 46.4
  Top Layer w0.152: U9.A2@13.716,16.256 14.224,16.256 14.478,16.002 17.272,16.002 17.526,16.256 C28.2@17.526,16.764 17.534,16.756 C27.1@18.542,16.756 19.462,16.756 19.65,16.568 19.7,16.568 Y1.1@20.024,16.244 ; Y1.1@20.024,16.194 Y1.1@20.024,16.244 ; U10.22@24.334,8.284 23.27,8.284 22.86,7.874 22.86,5.08 23.914,4.026 25.616,4.026 26.416,4.826 26.416,6.35 28.956,8.89 28.956,11.176 29.464,11.684 v1(29.464,13.462) ; U10.13@24.834,13.004 24.834,14.028 C29.2@24.638,14.224 C30.2@24.638,15.24 24.638,16.764 24.384,17.018 22.606,17.018 22.352,16.764 v1(22.352,16.256) 20.086,16.256 20.024,16.318 Y1.1@20.024,16.244
  Bottom Layer w0.152: v1(22.352,16.256) 21.59,16.256 21.336,16.002 21.336,14.478 22.314,13.5 29.426,13.5 v1(29.464,13.462)
V_USB_BLOCKING: C40.2 C41.2 R13.2 U6.4 U11.A2 | length 17.1
  Top Layer w0.152: U11.A2@41.597,2.963 42.447,2.963 42.701,3.217 42.701,4.437 ; C40.2@42.701,9.059 C41.2@42.701,8.043 42.701,4.437 ; R13.2@43.463,5.469 v1(43.463,4.437) 42.701,4.437 ; U6.4@47.233,6.467 47.233,7.191 47.692,7.65 47.716,7.65 v1(47.767,7.701)
  Bottom Layer w0.152: v1(43.463,4.437) 43.463,6.379 44.704,7.62 47.686,7.62 v1(47.767,7.701)
VCC: C9.1 C10.1 C23.1 C24.2 C25.1 C26.2 J1.1 J2.3 L5.2 R1.1 R2.1 R3.1 R4.1 R5.1 U1.13 U1.36 U1.48 U7.3 U7.7 U7.8 U8.5 U10.19 | length 90.6
  Top Layer w0.152: J1.1@5.334,13.208 6.096,13.208 6.35,13.462 8.128,13.462 9.398,12.192 v1(9.398,11.43) ; U1.36@9.398,5.804 9.398,3.302 9.652,3.048 C10.1@9.652,2.286 ; C25.1@13.97,1.016 C26.2@15.494,1.016 v1(15.494,3.81) 14.732,3.81 14.548,3.994 U1.48@14.548,5.054 ; U1.13@14.548,10.954 14.548,10.944 14.57,10.922 v1(15.413,10.922) C9.1@16.256,10.922 16.256,11.43 16.51,11.684 17.018,11.684 17.272,11.938 17.272,12.438 R5.1@17.264,12.446 17.264,13.47 17.018,13.716 R4.1@16.494,13.716 ; U8.5@20.111,1.92 20.97,1.92 21.194,2.144 U7.3@22.352,2.144 23.568,2.144 v1(23.893,2.469) 24.218,2.794 U7.7@25.232,2.794 ; v1(20.574,5.842) 21.066,5.35 R2.1@21.066,4.826 R3.1@21.066,3.81 ; v1(22.024,10.098) 22.047,10.121 23.451,10.121 U10.19@23.474,10.144 ; U7.8@25.232,3.444 U7.7@25.232,2.794 ; L5.2@27.432,5.334 27.432,4.826 26.852,4.246 26.852,3.992 C24.2@26.67,3.81 C23.1@26.67,2.794 U7.7@25.232,2.794
  Bottom Layer w0.152: v1(9.398,11.43) v1(9.398,3.81) v1(15.494,3.81) ; v1(15.413,10.922) 15.494,10.841 15.494,10.16 ; v1(20.574,5.842) 15.494,5.842 ; v1(22.024,10.098) 15.556,10.098 15.494,10.16 ; J2.3@27.432,6.096 27.432,3.81 28.448,2.794 28.448,1.27 27.94,0.762 25.654,0.762 25.146,1.27 25.146,2.032 24.709,2.469 v1(23.893,2.469) 22.789,2.469 21.336,1.016 16.002,1.016 15.494,1.524 v1(15.494,3.81) ; v1(15.494,3.81) 15.494,5.842 ; 15.494,5.842 15.494,10.16
pads on no net: E1.2 J1.6 J1.7 U1.4 U1.5 U1.6 U1.7 U1.16 U1.27 U1.28 U1.29 U1.37 U1.38 U1.39 U1.40 U1.41 U1.42 U1.43 U1.44 U6.8 U10.1 U10.2 U10.4 U10.5 U10.24 U10.26

## Polygon pours and split planes (outlines as drawn)
GND on Top Layer "GND_L01_P000" (hatched 45Degree grid 0.508 track 0.152, remove dead copper, pour order 0): 3.556,0.254 3.556,6.096 0,6.096 0,17.526 29.464,17.526 29.464,0
GND on Top Layer "GND_L01_P002" (hatched 45Degree grid 0.508 track 0.152, remove dead copper, pour order 2): 39.116,0 39.116,17.526 55.118,17.526 55.118,0
GND on Bottom Layer "GND_L02_P003" (hatched 45Degree grid 0.508 track 0.152, remove dead copper, pour order 3): 39.116,0 39.116,17.526 54.864,17.526 54.864,0
GND on Bottom Layer "GND_L02_P001" (hatched 45Degree grid 0.508 track 0.152, remove dead copper, pour order 1): 3.556,0 3.556,6.096 0,6.096 0,17.526 29.464,17.526 29.464,0

## Keep-outs
Keep-Out Layer:
  lines w0.254: 0,1.638 ccw(c1.638,1.638) 1.638,0 51.562,0 53.13,0 ccw(c53.13,1.734) 54.864,1.734 54.864,15.792 ccw(c53.13,15.792) 53.13,17.526 51.562,17.526 1.638,17.526 ccw(c1.638,15.888) 0,15.888 0,1.638

## Other copper
Top Layer:
  region net GND: 29.972,0.508 29.972,5.842 38.608,5.842 38.608,0.508
  region net NetC13_1: 29.972,6.096 29.972,11.43 38.608,11.43 38.608,6.096
  region net MCU_ENABLE_VCC: 29.972,11.684 29.972,17.018 38.608,17.018 38.608,11.684
Bottom Layer: